# Altium PCB 两层板（未画完）.PcbDoc
Units mil, origin at the board's own origin, x right, y up, seen from the top; angles counter-clockwise.
Board outline 2498.11 x 2068.5 mil, 2 copper layers (Top Layer, Bottom Layer); 105 components, 73 nets, 380 pads, 95 vias.
Unrouted connection lines stored in the file: 41.
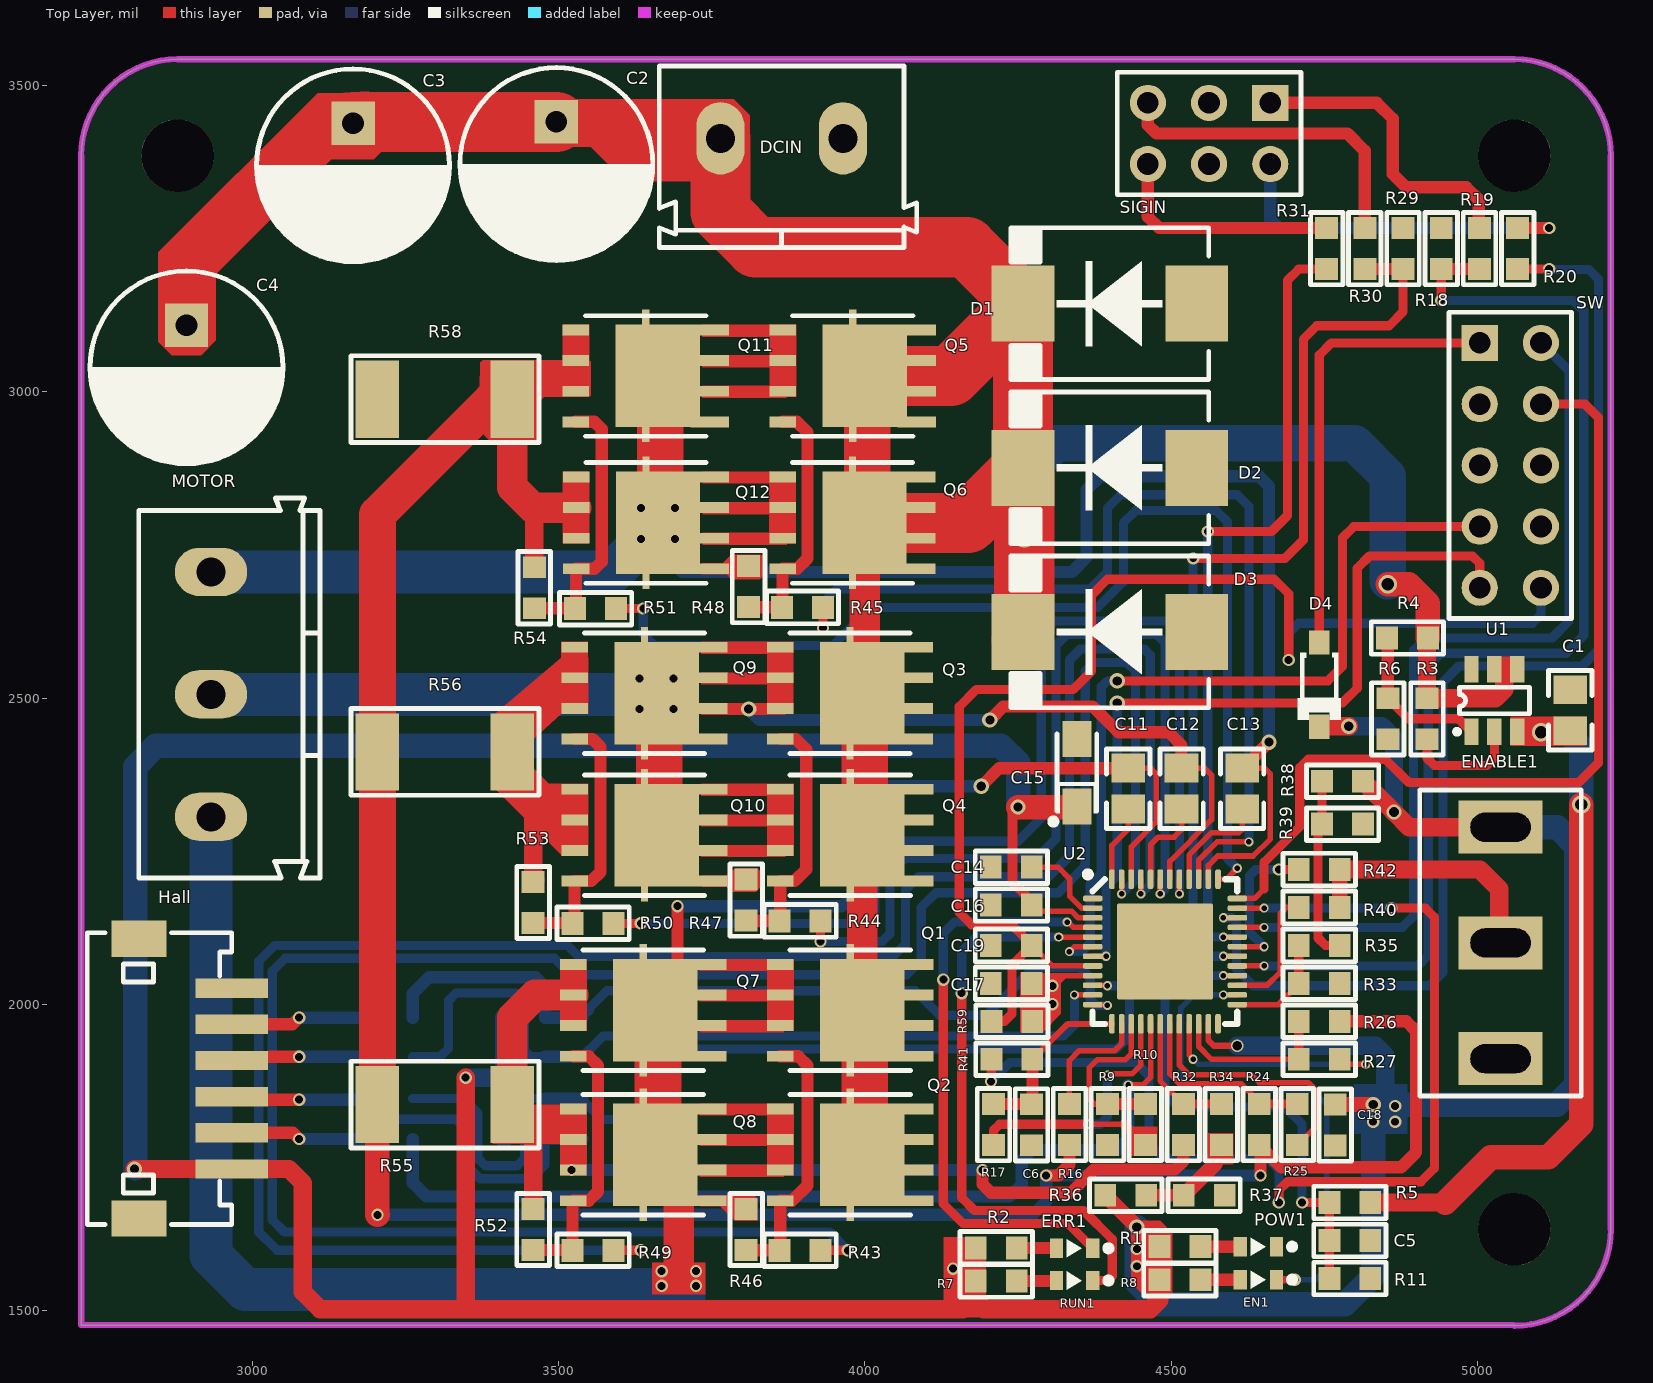
[diagram p0: Top Layer view]
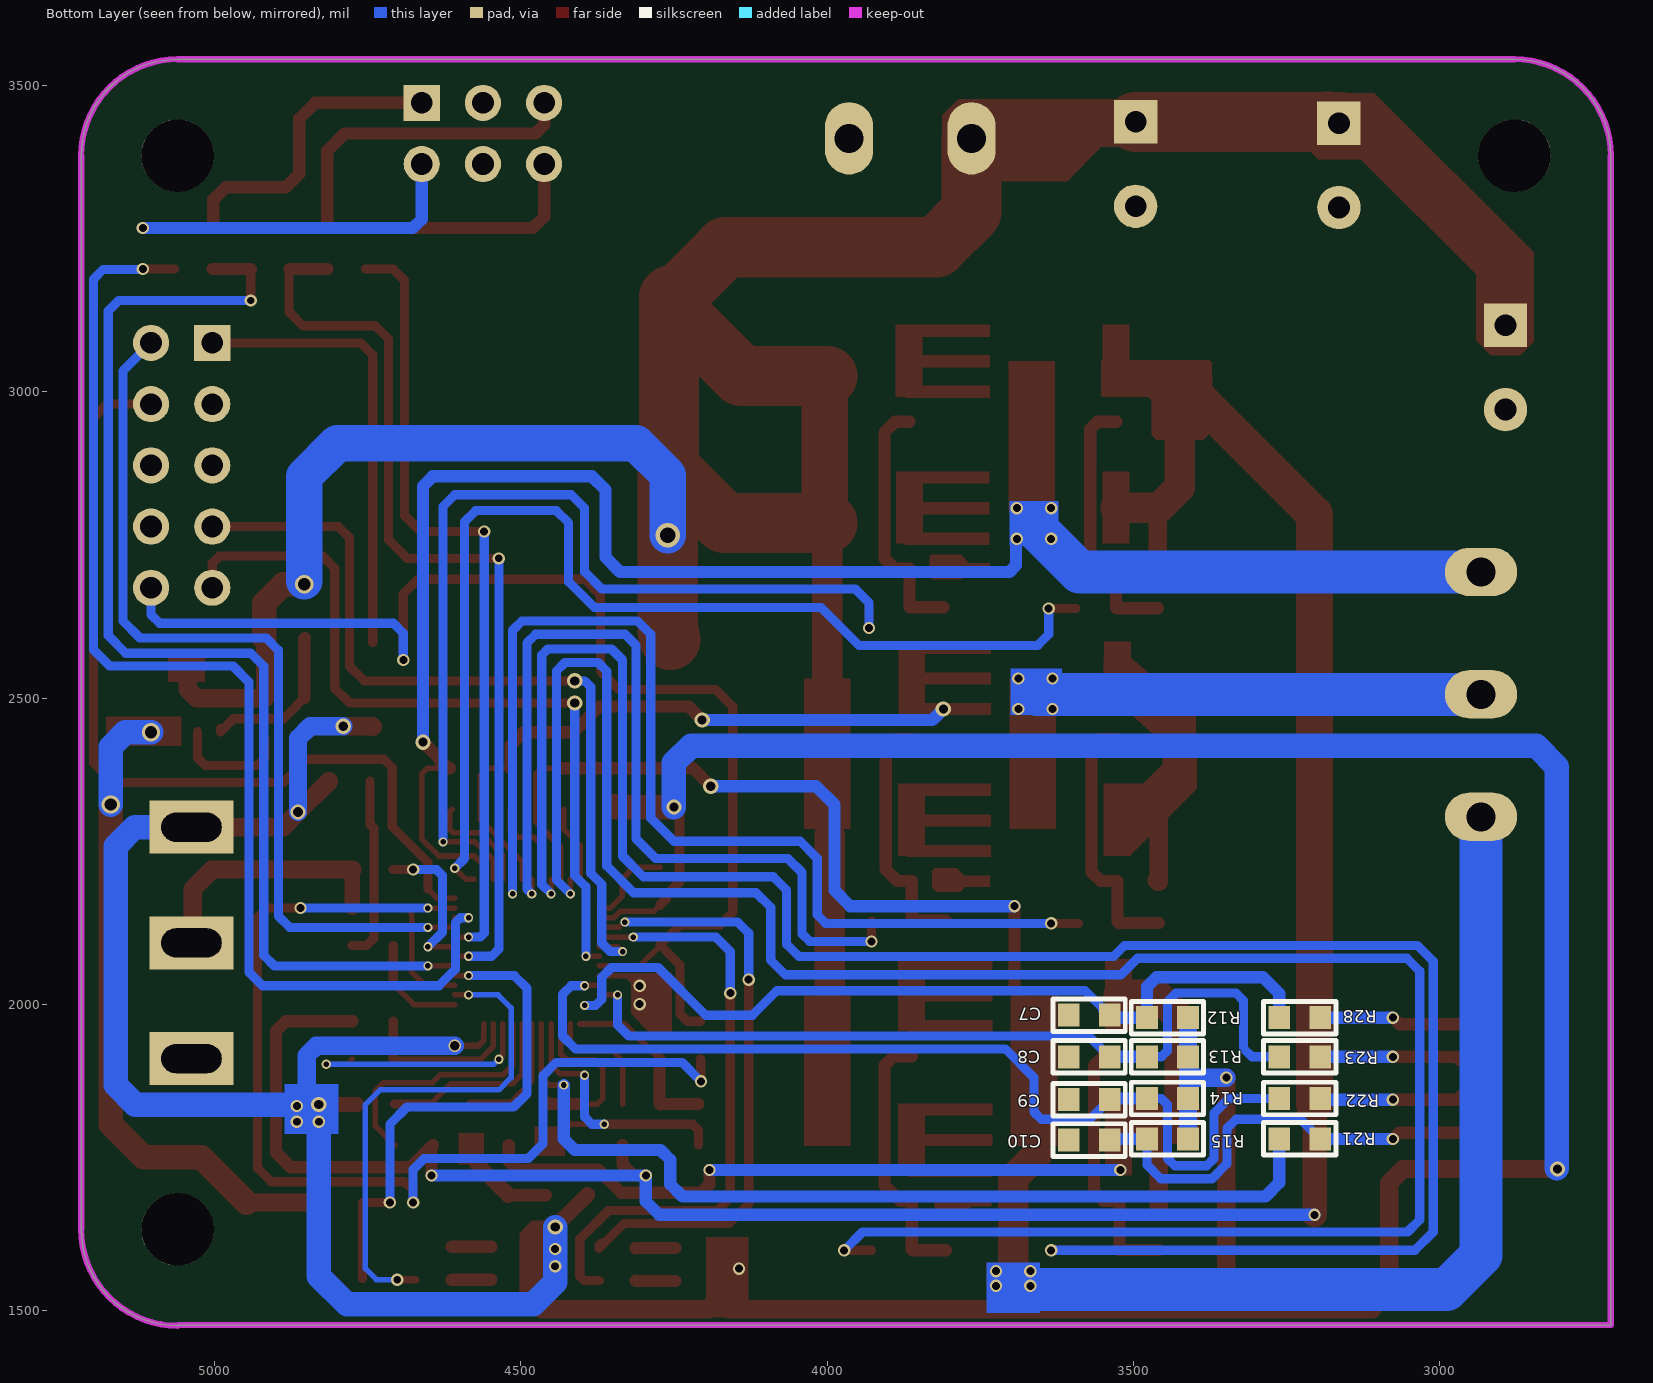
[diagram p1: Bottom Layer view, seen from below]
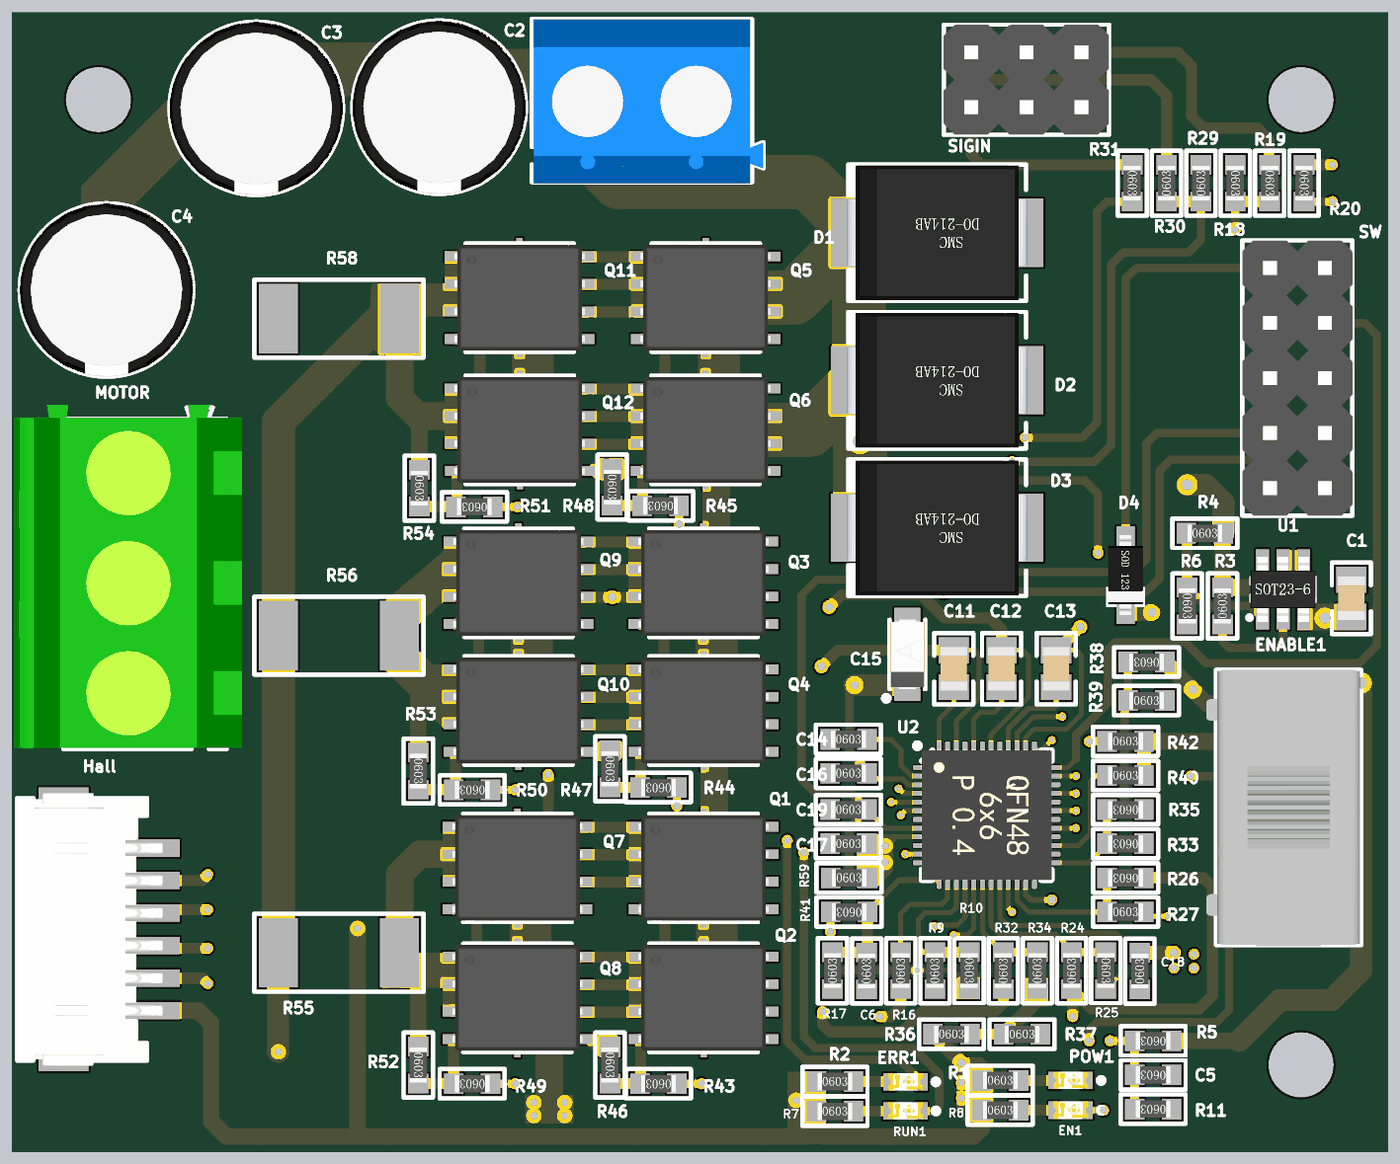
[diagram p2: 3D render of the assembled board from above, using the file's embedded part models]
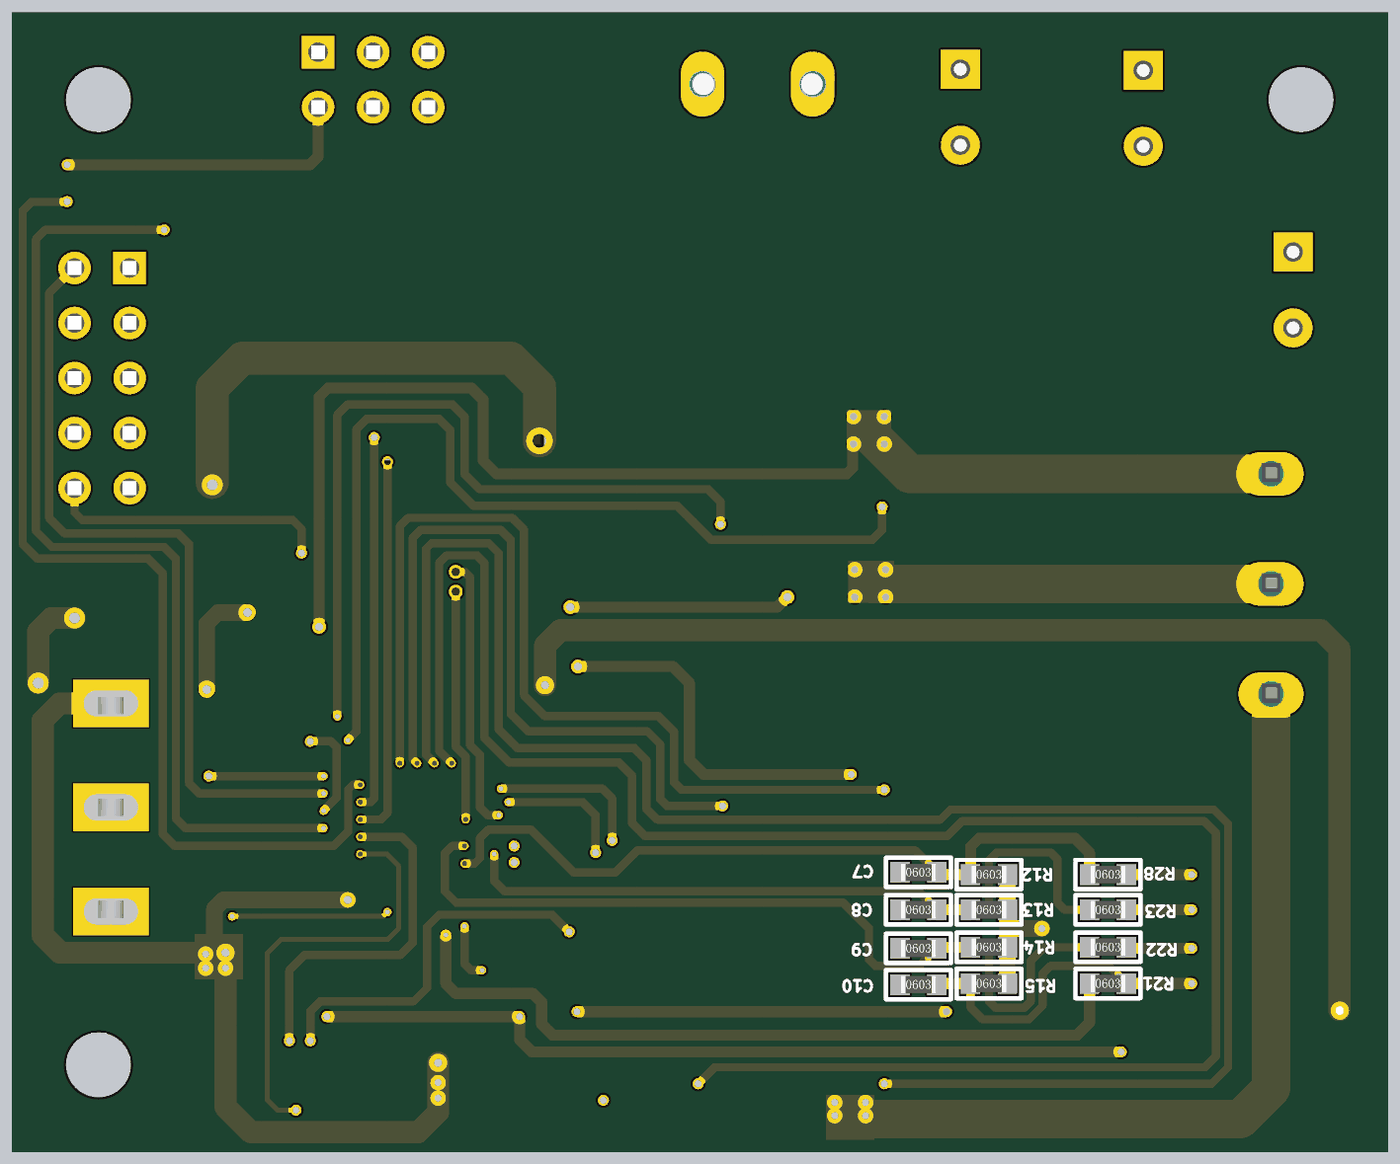
[diagram p3: 3D render of the assembled board from below, using the file's embedded part models]

## Layer stack, top to bottom
Top Solder: solder mask 0.4, Solder Resist, Dk 3.5
Top Layer: signal copper 1.4
Dielectric 1: dielectric 12.6, FR-4, Dk 4.8
Bottom Layer: signal copper 1.4
Bottom Solder: solder mask 0.4, Solder Resist, Dk 3.5

## Board outline
2720,1476 2720,3385.83 cw(c2877.48,3385.83) 2877.48,3543.31 5060.63,3543.31 cw(c5060.63,3385.83) 5218.11,3385.83 5218.11,1632.28 cw(c5060.63,1632.28) 5060.63,1474.8 5059.43,1476

## Design rules (kind name [scope] priority, off if disabled: settings)
Clearance [All] p1: gap=6 ignorepadtopadclearanceinfootprint=FALSE
PlaneClearance [All] p1: clearance=30
PlaneConnect [All] p1: planeconnectstyle=Relief reliefexpansion=20 reliefentries=4 reliefconductorwidth=20 reliefairgap=20
PolygonConnect [All] p1: connectstyle=Relief reliefconductorwidth=20 reliefentries=4 polygonreliefangle="45 Angle" airgapwidth=20
RoutingVias [All] p1: holewidth=28 width=50 viastyle="Through Hole" minholewidth=7.87 minwidth=15 maxholewidth=28 maxwidth=50
SilkToSilkClearance [All] p1: silktosilkclearance=6
SilkToSolderMaskClearance [IsPad] p1: minsilkscreentomaskgap=6 clearancetoexposedcopper=TRUE
SolderMaskExpansion [All] p1: expansion=4
Width [All] p1: maxlimit=98.43 minlimit=9 preferedwidth=10 minimp=50.000000 maximp=50.000000 favimp=50.000000
26 further rules are at their usual default settings.

## Classes and differential pairs
net class pow: GND

## Components (designator, comment, footprint, x,y, rotation, side; value= is the part's Value field where it differs from the comment)
C1 "10uF ±10% 25V" CAPC2012[0805]S-N 5152,2480 r90 top value=10uF
C2 "470uF 25V" CAPPR3.5-8X12 3496,3372 r270 top value=470uF
C3 "470uF 25V" CAPPR3.5-8X12 3164,3370 r270 top value=470uF
C4 "470uF 25V" CAPPR3.5-8X12 2892,3040 r270 top value=470uF
C5 "100nF ±10% 50V" RESC1608[0603]S-N 4792,1614 r180 top value=100nF
C6 "1uF ±10% 10V" RESC1608[0603]S-N 4272,1802.9 r90 top value=1uF
C7 "100nF ±10% 50V" RESC1608[0603]S-N 3572,1982 r180 bottom value=100nF
C8 "100nF ±10% 50V" RESC1608[0603]S-N 3572,1914 r180 bottom value=100nF
C9 "100nF ±10% 50V" RESC1608[0603]S-N 3572,1844 r180 bottom value=100nF
C10 "100nF ±10% 50V" RESC1608[0603]S-N 3572,1778 r180 bottom value=100nF
C11 "10uF ±10% 25V" CAPC2012[0805]S-N 4430.09,2352 r90 top value=10uF
C12 "10uF ±10% 25V" CAPC2012[0805]S-N 4517.05,2352 r90 top value=10uF
C13 "10uF ±10% 25V" CAPC2012[0805]S-N 4616,2352 r90 top value=10uF
C14 "100nF ±10% 50V" RESC1608[0603]S-N 4239.07,2223.72 r0 top value=100nF
C15 "10uF 16V" CAPT3216 4346,2378 r90 top value=10uF
C16 "100nF ±10% 50V" RESC1608[0603]S-N 4239.07,2162 r0 top value=100nF
C17 "100nF ±10% 50V" RESC1608[0603]S-N 4239.07,2034 r0 top value=100nF
C18 "100nF ±10% 50V" RESC1608[0603]S-N 4768,1802.54 r90 top value=100nF
C19 "100nF ±10% 50V" RESC1608[0603]S-N 4239.07,2096 r0 top value=100nF
D1 "SMDJ20CA" SMC[DO-214AB] 4400,3144 r180 top
D2 "SMDJ20CA" SMC[DO-214AB] 4400,2876 r180 top
D3 "SMDJ20CA" SMC[DO-214AB] 4400,2608 r180 top
D4 "1N5819" SOD-123-L 4742,2522 r270 top
DCIN "KF/WJ/DG 30x connecter" "KF/WJ/DG 301-2p-5.0mm" 3864,3414 r180 top
EN1 "蓝色贴片LED" LEDC1608(0603)-L 4642.47,1550 r180 top
ENABLE1 "SW-SPDT" SS12D10 5038,2100 r90 top
ERR1 "黄色贴片LED" LEDC1608(0603)-L 4342.47,1601.33 r180 top
Hall "Header 6" ZH1.5-WF-6P 2966,1878.47 r270 top
MOTOR "KF/WJ/DG 30x connecter" "KF/WJ/DG 301-3p-5.0mm" 2932,2506 r270 top
POW1 "红色贴片LED" LEDC1608(0603)-L 4642.47,1604 r180 top
Q1 "TPH1R403NL" DFN5x6 3976,1990 r270 top
Q2 "TPH1R403NL" DFN5x6 3976,1754 r270 top
Q3 "TPH1R403NL" DFN5x6 3975.69,2508 r270 top
Q4 "TPH1R403NL" DFN5x6 3976,2276 r270 top
Q5 "TPH1R403NL" DFN5x6 3980,3026 r270 top
Q6 "TPH1R403NL" DFN5x6 3979.69,2786 r270 top
Q7 "TPH1R403NL" DFN5x6 3638,1990 r270 top
Q8 "TPH1R403NL" DFN5x6 3638,1754 r270 top
Q9 "TPH1R403NL" DFN5x6 3640,2508 r270 top
Q10 "TPH1R403NL" DFN5x6 3640,2276 r270 top
Q11 "TPH1R403NL" DFN5x6 3642,3026 r270 top
Q12 "TPH1R403NL" DFN5x6 3642.31,2786 r270 top
R1 "20K ±1%" RESC1608[0603]S-N 4514.47,1604 r0 top value=20K
R2 "10K ±1%" RESC1608[0603]S-N 4214.47,1602 r0 top value=10K
R3 "1M ±1%" RESC1608[0603]S-N 4918,2466 r90 top value=1M
R4 "20K ±1%" RESC1608[0603]S-N 4886,2598 r0 top value=20K
R5 "30K ±1%" RESC1608[0603]S-N 4792,1676 r180 top value=30K
R6 "2K ±1%" RESC1608[0603]S-N 4854,2466 r270 top value=2K
R7 "10K ±1%" RESC1608[0603]S-N 4214.47,1548 r0 top value=10K
R8 "10K ±1%" RESC1608[0603]S-N 4514.47,1550 r0 top value=10K
R9 "1K ±1%" RESC1608[0603]S-N 4396,1803.46 r90 top value=1K
R10 "47K ±1%" RESC1608[0603]S-N 4458,1803.46 r270 top value=47K
R11 "10K ±1%" RESC1608[0603]S-N 4792,1552 r180 top value=10K
R12 "4.7K ±1%" RESC1608[0603]S-N 3444,1978 r180 bottom value=4.7K
R13 "4.7K ±1%" RESC1608[0603]S-N 3444,1914 r180 bottom value=4.7K
R14 "4.7K ±1%" RESC1608[0603]S-N 3444,1846 r180 bottom value=4.7K
R15 "4.7K ±1%" RESC1608[0603]S-N 3444,1780 r180 bottom value=4.7K
R16 "1K ±1%" RESC1608[0603]S-N 4334,1803.46 r90 top value=1K
R17 "10K ±1%" RESC1608[0603]S-N 4210,1803.46 r90 top value=10K
R18 "10K ±1%" RESC1608[0603]S-N 4941.2,3234 r270 top value=10K
R19 "100R ±1%" RESC1608[0603]S-N 5003.6,3234 r270 top value=100R
R20 "100R ±1%" RESC1608[0603]S-N 5066,3234 r270 top value=100R
R21 "100R ±1%" RESC1608[0603]S-N 3228,1780 r180 bottom value=100R
R22 "100R ±1%" RESC1608[0603]S-N 3228,1846 r180 bottom value=100R
R23 "100R ±1%" RESC1608[0603]S-N 3228,1914 r180 bottom value=100R
R24 "1K ±1%" RESC1608[0603]S-N 4644,1803.46 r90 top value=1K
R25 "100K ±1%" RESC1608[0603]S-N 4706,1803.46 r270 top value=100K
R26 "1K ±1%" RESC1608[0603]S-N 4742,1972 r180 top value=1K
R27 "100K ±1%" RESC1608[0603]S-N 4742,1910 r0 top value=100K
R28 "100R ±1%" RESC1608[0603]S-N 3228,1978 r180 bottom value=100R
R29 "10K ±1%" RESC1608[0603]S-N 4878.8,3234 r90 top value=10K
R30 "100R ±1%" RESC1608[0603]S-N 4816.4,3234 r90 top value=100R
R31 "100R ±1%" RESC1608[0603]S-N 4754,3234 r270 top value=100R
R32 "1K ±1%" RESC1608[0603]S-N 4520,1803.46 r90 top value=1K
R33 "1K ±1%" RESC1608[0603]S-N 4742,2034 r180 top value=1K
R34 "100K ±1%" RESC1608[0603]S-N 4582,1803.46 r90 top value=100K
R35 "100K ±1%" RESC1608[0603]S-N 4742,2096 r180 top value=100K
R36 "10K ±1%" RESC1608[0603]S-N 4426,1688 r0 top value=10K
R37 "10K ±1%" RESC1608[0603]S-N 4554,1688 r0 top value=10K
R38 "10K ±1%" RESC1608[0603]S-N 4780,2364 r180 top value=10K
R39 "10K ±1%" RESC1608[0603]S-N 4780,2294 r0 top value=10K
R40 "1K ±1%" RESC1608[0603]S-N 4742,2158 r0 top value=1K
R41 "100R ±1%" RESC1608[0603]S-N 4240,1910 r180 top value=100R
R42 "1K ±1%" RESC1608[0603]S-N 4742,2220 r0 top value=1K
R43 "4R7 ±1%" RESC1608[0603]S-N 3894,1598 r180 top value=4R7
R44 "4R7 ±1%" RESC1608[0603]S-N 3894,2136 r180 top value=4R7
R45 "4R7 ±1%" RESC1608[0603]S-N 3898,2648 r180 top value=4R7
R46 "10K ±1%" RESC1608[0603]S-N 3806,1632 r270 top value=10K
R47 "10K ±1%" RESC1608[0603]S-N 3806,2170 r270 top value=10K
R48 "10K ±1%" RESC1608[0603]S-N 3810,2682 r270 top value=10K
R49 "4R7 ±1%" RESC1608[0603]S-N 3556,1598 r180 top value=4R7
R50 "4R7 ±1%" RESC1608[0603]S-N 3556,2132 r180 top value=4R7
R51 "4R7 ±1%" RESC1608[0603]S-N 3560,2646 r180 top value=4R7
R52 "10K ±1%" RESC1608[0603]S-N 3458,1632 r270 top value=10K
R53 "10K ±1%" RESC1608[0603]S-N 3458,2166 r270 top value=10K
R54 "10K ±1%" RESC1608[0603]S-N 3460,2680 r270 top value=10K
R55 "2mR ±1%" RESC6332[2512]S 3314,1836 r0 top value=2mR
R56 "2mR ±1%" RESC6332[2512]S 3314,2412 r0 top value=2mR
R58 "2mR ±1%" RESC6332[2512]S 3314,2988 r0 top value=2mR
R59 "10K ±1%" RESC1608[0603]S-N 4240,1972 r0 top value=10K
RUN1 "翠绿贴片LED" LEDC1608(0603)-L 4342.47,1548.67 r180 top
SIGIN "Header 3X2" HDR2X3 4662,3472 r180 top
SW "Header 5X2" HDR2X5 5004,3080 r270 top
U1 "ETA7014" SOT-23-6 5028,2496 r90 top
U2 "MM32SPIN360C" QFN48-6x6 4490,2086 r0 top

## Footprints (in the part's own frame and the unit in brackets; to place one, negate y for a bottom-side part, rotate by r counter-clockwise, add the part's x,y. Pads: shape width x height; smd on the part's side, far side on the other; paste and mask are expansions set on the pad)
CAPC2012[0805]S-N [mm]
  rect 1.2x1.4 smd: 1(-0.85,0) 2(0.85,0)
  silkscreen extent -1.65,-0.9 1.65,0.9, body extent -1,-0.63 1,0.62, height 1.25
CAPPR3.5-8X12 [mm]
  rect 1.8x1.8 hole 0.9: 1(-1.75,0)
  round 1.8 hole 0.9: 2(1.75,0)
  silkscreen extent -4,-4.01 4,4, body extent -4,-4 4,4, height 12
CAPT3216 [mm]
  rect 1.5x1.2 smd: 1(-1.4,0) 2(1.4,0)
  silkscreen extent -2.15,-0.9 1.6,1.1, body extent -1.6,-0.8 1.6,0.8, height 1.6
DFN5x6 [mm]
  rect 0.45x1.6 smd: 1(-1.905,2.65) 1(-0.635,2.65) 1(0.635,2.65) 1(1.905,2.65)
  rect 4.25x3.5 smd: 1(0,0.5)
  rect 5.5x0.3 smd: 1(0,0)
  rect 0.45x1.1 smd: 2(1.905,-2.9) 3(-1.905,-2.9) 3(-0.635,-2.9) 3(0.635,-2.9)
  silkscreen extent -2.5,-2.5 2.5,2.5, body extent -2.45,-3 2.45,3, height 1
HDR2X3 [mm]
  rect 1.5x1.5 hole 0.9: 1(0,0)
  round 1.5 hole 0.9: 2(0,2.54) 3(2.54,0) 4(2.54,2.54) 5(5.08,0) 6(5.08,2.54)
  silkscreen extent -1.27,-1.27 6.35,3.81, body extent -1.27,-1.27 6.35,3.81, height 8.54
HDR2X5 [mm]
  rect 1.5x1.5 hole 0.9: 1(0,0)
  round 1.5 hole 0.9: 2(0,2.54) 3(2.54,0) 4(2.54,2.54) 5(5.08,0) 6(5.08,2.54) 7(7.62,0) 8(7.62,2.54) 9(10.16,0) 10(10.16,2.54)
  silkscreen extent -1.27,-1.27 11.43,3.81, body extent -1.27,-1.27 11.43,3.81, height 8.54
"KF/WJ/DG 301-2p-5.0mm" [mm]
  oval 2x3 hole 1.2: 1(2.54,0) 2(-2.54,0)
  silkscreen extent -5.6,-3 5.08,4.53, body extent -5.6,-3 5,4.6, height 10
"KF/WJ/DG 301-3p-5.0mm" [mm]
  oval 2x3 hole 1.2: 1(5.08,0) 2(0,0) 3(-5.08,0)
  silkscreen extent -8.14,-3 7.62,4.53, body extent -8.27,-5.26 7.57,5.24, height 14.35
LEDC1608(0603)-L [mm]
  rect 0.55x0.8 smd: A(0.75,0) C(-0.75,0)
  silkscreen extent -1.53,-0.38 0.33,0.38, body extent -0.8,-0.4 0.8,0.4, height 0.64
QFN48-6x6 [mm]
  rrect5% 4x4 smd paste+0 mask+0.05: 0(0,0)
  rrect50% 0.8x0.23 smd paste+0 mask+0.05: 1(-3,2.2) 2(-3,1.8) 3(-3,1.4) 4(-3,1) 5(-3,0.6) 6(-3,0.2) 7(-3,-0.2) 8(-3,-0.6) 9(-3,-1) 10(-3,-1.4) 11(-3,-1.8) 12(-3,-2.2) 25(3,-2.2) 26(3,-1.8) 27(3,-1.4) 28(3,-1) 29(3,-0.6) 30(3,-0.2) 31(3,0.2) 32(3,0.6) 33(3,1) 34(3,1.4) 35(3,1.8) 36(3,2.2)
  rrect50% 0.23x0.8 smd paste+0 mask+0.05: 13(-2.2,-3) 14(-1.8,-3) 15(-1.4,-3) 16(-1,-3) 17(-0.6,-3) 18(-0.2,-3) 19(0.2,-3) 20(0.6,-3) 21(1,-3) 22(1.4,-3) 23(1.8,-3) 24(2.2,-3) 37(2.2,3) 38(1.8,3) 39(1.4,3) 40(1,3) 41(0.6,3) 42(0.2,3) 43(-0.2,3) 44(-0.6,3) 45(-1,3) 46(-1.4,3) 47(-1.8,3) 48(-2.2,3)
  silkscreen extent -3.32,-3 3,3.32, body extent -3.02,-3.02 3.02,3.02, height 0.65
RESC1608[0603]S-N [mm]
  rect 0.9x0.95 smd: 1(-0.85,0) 2(0.85,0)
  silkscreen extent -1.5,-0.67 1.5,0.67, body extent -0.8,-0.4 0.8,0.4, height 0.45
RESC6332[2512]S [mm]
  rect 1.8x3.2 smd: 1(-2.8,0) 2(2.8,0)
  silkscreen extent -3.9,-1.8 3.9,1.8, body extent -3.22,-1.68 3.22,1.68, height 0.71
SMC[DO-214AB] [mm]
  rect 2.6x3.15 smd: A(-3.6,0) K(3.6,0)
  silkscreen extent -4.1,-3.15 4.1,3.15, body extent -4.17,-3.11 4.18,3.11, height 2.3
SOD-123-L [mm]
  rect 1x0.85 smd: A(-1.75,0) K(1.75,0)
  silkscreen extent -1.32,-0.9 1.48,0.9, body extent -1.85,-0.8 1.85,0.8, height 1.2
SOT-23-6 [mm]
  rect 1.1x0.6 smd: 1(-1.3,0.95) 2(-1.3,0) 3(-1.3,-0.95) 4(1.3,-0.95) 5(1.3,0) 6(1.3,0.95)
  silkscreen extent -1.37,-1.45 0.55,1.62, body extent -1.5,-1.5 1.5,1.5, height 1.55
SS12D10 [mm]
  rect 2.2x3.5 hole 1.2 slot 2.5 at 90 deg mask+0.07: 1(-4.8,0) 2(0,0) 3(4.8,0)
  silkscreen extent -6.35,-3.35 6.35,3.35, body extent -6.4,-3.3 6.35,3.8, height 12.5
ZH1.5-WF-6P [mm]
  rect 1.5x2.3 smd: 0(-5.8,-3.85) 0(5.8,-3.85)
  rect 0.8x3 smd: 1(-3.75,0) 2(-2.25,0) 3(-0.75,0) 4(0.75,0) 5(2.25,0) 6(3.75,0)
  silkscreen extent -6.05,-6 6.05,0, body extent -6.29,-6 6.29,0.71, height 3.9

## Part data
C1 C11 C12 C13: library part Cap-Chip, "贴片电容", Tolerance=±10%, Voltage=25V, Published=2020-12-18, Revision=V1.1
C2 C3 C4: library part Cap-Elect, "Polarized Capacitor (Radial)", Voltage=25V, Price(RMB)=0.000, Published=8-Jun-2000, Publisher="Altium Limited", Revision="July-2002: Re-released for DXP Platform."
C5 C7 C8 C9 C10 C14 C16 C17 C18 C19: library part Cap-Chip_1, "贴片电容", Tolerance=±10%, Voltage=50V, Published=2020-12-18, Revision=V1.1
C6: library part Cap-Chip_2, "贴片电容", Tolerance=±10%, Voltage=10V, Published=2020-12-18, Revision=V1.1
C15: library part Cap-Tan, "Tantalum Capacitor", Voltage=16V, Price(RMB)=0.000, Published=8-Jun-2000, Publisher="Altium Limited", Revision="July-2002: Re-released for DXP Platform."
D1 D2 D3: library part "Diode TVS Bi-Dir", "TRANSIENT VOLTAGE  SUPPRESSOR DIODE", Imax=500mA, Price(RMB)=0.000, Published=8-Jun-2000, Publisher="Altium Limited"
D4: library part Diode, "普通二极管 Diode", Imax=500mA, Price(RMB)=0.000, Published=8-Jun-2000, Publisher="Altium Limited", Revision="July-2002: Re-released for DXP Platform."
DCIN: library part "KF/WJ/DG 30x", "接线端子 2Pin"
EN1: library part "LED Chip Blue", Color=Blue, Price(RMB)=0.00, Published=8-Jun-2000, Publisher="Altium Limited", Revision="July-2002: Re-released for DXP Platform."
ENABLE1: "单刀双掷开关 3脚船型、钮子、拨动开关 SPDT Subminiature Toggle Switch"
ERR1: library part "LED Chip Yellow", Price(RMB)=0.00, Published=8-Jun-2000, Publisher="Altium Limited", Revision="July-2002: Re-released for DXP Platform."
Hall: "Header, 6-Pin", LatestRevisionDate=17-Jul-2002, LatestRevisionNote="Re-released for DXP Platform.", Price(RMB)=0.00, Publisher="Altium Limited"
MOTOR: library part "KF/WJ/DG 30x-3P", "接线端子 3Pin"
POW1: library part "LED Chip Red", Price(RMB)=0.00, Published=8-Jun-2000, Publisher="Altium Limited", Revision="July-2002: Re-released for DXP Platform."
Q1 Q2 Q3 Q4 Q5 Q6 Q7 Q8 Q9 Q10 Q11 Q12: "东芝 N沟 MOS"
R1 R4: library part Res-Chip_2, "贴片电阻", Tolerance=±1%, Published=8-Jun-2000, Revision="July-2002: Re-released for DXP Platform."
R2 R7 R8 R11 R17 R18 R29 R36 R37 R38 R39 R46 R47 R48 R52 R53 R54 R59: library part Res-Chip, "贴片电阻", Tolerance=±1%, Published=8-Jun-2000, Revision="July-2002: Re-released for DXP Platform."
R3: library part Res-Chip_6, "贴片电阻", Tolerance=±1%, Published=8-Jun-2000, Revision="July-2002: Re-released for DXP Platform."
R5: library part Res-Chip_1, "贴片电阻", Tolerance=±1%, Published=8-Jun-2000, Revision="July-2002: Re-released for DXP Platform."
R6: library part Res-Chip_9, "贴片电阻", Tolerance=±1%, Published=8-Jun-2000, Revision="July-2002: Re-released for DXP Platform."
R9 R16 R24 R26 R32 R33 R40 R42: library part Res-Chip_3, "贴片电阻", Tolerance=±1%, Published=8-Jun-2000, Revision="July-2002: Re-released for DXP Platform."
R10: library part Res-Chip_4, "贴片电阻", Tolerance=±1%, Published=8-Jun-2000, Revision="July-2002: Re-released for DXP Platform."
R12 R13 R14 R15: library part Res-Chip_7, "贴片电阻", Tolerance=±1%, Published=8-Jun-2000, Revision="July-2002: Re-released for DXP Platform."
R19 R20 R21 R22 R23 R28 R30 R31 R41: library part Res-Chip_8, "贴片电阻", Tolerance=±1%, Published=8-Jun-2000, Revision="July-2002: Re-released for DXP Platform."
R25 R27 R34 R35: library part Res-Chip_5, "贴片电阻", Tolerance=±1%, Published=8-Jun-2000, Revision="July-2002: Re-released for DXP Platform."
R43 R44 R45 R49 R50 R51: library part Res-Chip_10, "贴片电阻", Tolerance=±1%, Published=8-Jun-2000, Revision="July-2002: Re-released for DXP Platform."
R55 R56 R58: library part Res-Chip_11, "贴片电阻", Tolerance=±1%, Published=8-Jun-2000, Revision="July-2002: Re-released for DXP Platform."
RUN1: library part "LED Chip Green", Price(RMB)=0.00, Published=8-Jun-2000, Publisher="Altium Limited", Revision="July-2002: Re-released for DXP Platform."
SIGIN: "Header, 3-Pin, Dual row", LatestRevisionDate=17-Jul-2002, LatestRevisionNote="Re-released for DXP Platform.", Price(RMB)=0.00, Publisher="Altium Limited"
SW: "Header, 5-Pin, Dual row", LatestRevisionDate=17-Jul-2002, LatestRevisionNote="Re-released for DXP Platform.", Price(RMB)=0.00, Publisher="Altium Limited"
U1: "ETA7014 OVPоƬ"
U2: ComponentLink1Description="Manufacturer Link", ComponentLink1URL=www.st.com/stm32, ComponentLink2Description=Datasheet, ComponentLink2URL=http://www.st.com/stonline/products/literature/ds/13587.pdf, DatasheetVersion="rev6, Mar-2008", PackageDescription="48-Pin Low-Profile Quad Flat Pack, 7 x 7 mm Body, 0.5 mm Pitch (LQFP48)", PackageReference=LQFP48, PackageVersion=Mar-2008, Published=30-May-2008, Publisher="Altium Limited"

## Free pads (board coordinates)
  round 118.11 hole 118.11 unplated: 0(2877.48,3385.83) 0(5060.63,1632.28) 0(5060.63,3385.83)

## Via types
v1: diameter 20, hole 13, Top Layer to Bottom Layer, 48 vias
v2: diameter 15, hole 9, Top Layer to Bottom Layer, 27 vias
v3: diameter 25, hole 15, Top Layer to Bottom Layer, 10 vias
v4: diameter 30, hole 20, Top Layer to Bottom Layer, 3 vias
v5: diameter 20, hole 12, Top Layer to Bottom Layer, 3 vias
v6: diameter 25, hole 16, Top Layer to Bottom Layer, 2 vias
v7: diameter 40, hole 25, Top Layer to Bottom Layer, 1 vias
v8: diameter 20, hole 15, Top Layer to Bottom Layer, 1 vias

## Nets (pads, with @x,y where several pads share a name; then routed paths per layer and width w, separated by ;. In a path a pad name is that pad's centre, name@x,y a point inside that pad or via, vN(x,y) a via of type N, cw(c..) or ccw(c..) an arc to the next point about the centre after c; other vN are vias at no path point)
A0: C9.2 R14.1 R22.1 U2.10 | length 1594
  Top Layer w9: U2.10 4395.15,2030.85 v2(4396,2030)
  Bottom Layer w15: R22.1 3344,1846 3368,1822 3368,1748 3380,1736 3432,1736 3444,1748 3444,1836 3454,1846 R14.1 ; C9.2 3538.54,1843.02 3548.75,1832.8 3549.74,1832.8 3570.74,1811.8 3628.77,1811.8 3628.97,1812 3650,1812 3662,1824 3662,1880 3709,1927 4411,1927 4432,1948 4432,2016 4418,2030 v2(4396,2030)
  Bottom Layer w20: R14.1 C9.2@3538.54,1846
A1: C8.2 R13.1 R23.1 U2.11 | length 1360.3
  Top Layer w9: v2(4342.13,2015.13) U2.11
  Bottom Layer w15: R23.1 3306,1914 3320,1928 3320,2006 3332,2018 3430,2018 3444,2004 3444,1924 3454,1914 R13.1 ; C8.2 3538.54,1914.98 3548.75,1925.2 3549.74,1925.2 3572.54,1948 4324,1948 4342.13,1966.13 v2(4342.13,2015.13)
  Bottom Layer w20: R13.1 C8.2
A2: C7.2 R12.1 R28.1 U2.12 | length 1379.4
  Top Layer w9: U2.12 4393.02,1999.36 4394.38,1998 v2(4396,1998)
  Bottom Layer w15: C7.2@3547.24,1990.7 3578.54,2022 4082,2022 4122,1982 4198,1982 4276,2060 4352,2060 4368,2044 4368,2008 4378,1998 v2(4396,1998)
  Bottom Layer w20: R28.1 3261.46,2017.46 3288,2044 3462,2044 3477.46,2028.54 R12.1 C7.2@3538.54,1978 ; C7.2 3538.54,1982.98 3546.25,1990.7 C7.2@3547.24,1990.7
A3: C6.2 R17.2 R41.1 U2.13 | length 291
  Top Layer w10: R41.1 4273.46,1910.98 4286.18,1923.7 4287.17,1923.7 4331.35,1967.89 U2.13
  Top Layer w20: R17.2 4271.43,1836.93 C6.2 4273.46,1837.83 R41.1
A4: R16.2 U2.14 | length 200.2
  Top Layer w9: R16.2 4334,1908 4350,1924 4408,1924 4419.13,1935.13 U2.14
A5: R9.2 R10.1 U2.15 | length 274.8
  Top Layer w9: R9.2 4375.07,1836.93 4366,1846 4366,1896 4379,1909 4425,1909 4434.88,1918.88 U2.15 ; R10.1@4456,1838.93 R10.1
  Top Layer w20: R9.2 4454,1836.93 R10.1@4456,1838.93
A6: R10.2 R17.1 U2.16 | length 553
  Top Layer w9: v2(4364,1804) 4423.02,1804 4424,1804 4443.8,1784.2 R10.2@4443.8,1783.22 ; v2(4396,1884) 4398,1886 4436,1886 4450.63,1900.63 U2.16
  Top Layer w15: R17.1 4210,1794 4220,1804 v2(4364,1804) ; 4423.02,1804 4443.8,1783.22 R10.2@4457.02,1770
  Bottom Layer w15: v2(4364,1804) 4384,1804 4396,1816 v2(4396,1884)
A7: R21.1 U2.17 | length 1528.7
  Top Layer w9: v2(4430,1868) 4454,1868 4466.38,1880.38 U2.17
  Bottom Layer w20: R21.1 3261.46,1708.54 3284,1686 4236,1686 4256,1706 4256,1746 4272,1762 4412,1762 4430,1780 v2(4430,1868)
A9: R18.2 R19.2 U2.29 | length 1949.3
  Top Layer w9: U2.29 v2@4651.62,2062.38
  Top Layer w15: v5(4941.2,3149.2) R18.2
  Top Layer w20: R18.2 R19.2
  Bottom Layer w15: v2(4651.87,2062.38) 4902.38,2062.38 4920,2080 4920,2552 4941.25,2573.25 5145.25,2573.25 5174,2602 5174,3132 5156.8,3149.2 v5(4941.2,3149.2)
A10: R29.1 R30.1 U2.30 | length 1548
  Top Layer w9: v2(4585.37,2078.13) U2.30
  Top Layer w15: v5(4536,2728) 4686,2728 4716,2758 4716,3086 4738,3108 4856,3108 4878.8,3130.8 R29.1
  Top Layer w20: R30.1 R29.1@4877.82,3200.54
  Bottom Layer w15: v5(4536,2728) 4536,2090 4547.87,2078.13 v2(4585.37,2078.13)
A11: R42.1 U2.31 | length 254.5
  Top Layer w9: U2.31 v2(4651.87,2093.87)
  Top Layer w15: v1(4676,2220) R42.1
  Bottom Layer w15: v2(4651.87,2093.87) 4628,2117.75 4628,2210 4638,2220 v1(4676,2220)
A12: R31.2 U2.32 | length 1303.2
  Top Layer w9: v2(4585.37,2109.62) U2.32
  Top Layer w15: v1(4560,2772) 4664,2772 4690,2798 4690,3182 4708.54,3200.54 R31.2
  Bottom Layer w15: v1(4560,2772) 4560,2116 4566.38,2109.62 v2(4585.37,2109.62)
B0: R32.2 R34.2 U2.18 | length 209.2
  Top Layer w9: U2.18 4482.13,1874.8 4505.8,1851.13 4505.8,1850.15 4519.02,1836.93 R32.2
  Top Layer w15: R32.2 R34.2
B1: R24.2 R25.1 U2.19 | length 314.3
  Top Layer w9: U2.19 4497.87,1886.13 4514,1870 4614.93,1870 4646,1838.93 R24.2
  Top Layer w15: R24.2 R25.1
B2: R25.2 U2.20 | length 411.3
  Top Layer w9: U2.20 4513.62,1900.38 4529,1885 4631,1885 4644,1872 4724,1872 4738,1858 4738,1802 4720.2,1784.2 4720.2,1783.22 4706.98,1770 R25.2
B10: R27.2 U2.21 | length 391.8
  Top Layer w9: U2.21 4529.37,1916.63 v2(4536,1910) ; R27.2 4783.46,1902 v2(4818,1902)
  Bottom Layer w9: v2(4536,1910) 4544,1902 v2(4818,1902)
B11: R26.2 R27.1 U2.22 | length 271.1
  Top Layer w9: U2.22 4545.12,1930.88 4566,1910 R27.1
  Top Layer w15: R27.1 R26.2
B12: R33.2 R35.2 U2.25 | length 177.3
  Top Layer w9: U2.25 4674.91,1999.39 4708.54,2033.02 R33.2
  Top Layer w15: R33.2 R35.2
B13: EN1.C U2.26 | length 828.5
  Top Layer w9: v2(4585.37,2015.13) U2.26
  Top Layer w12: EN1.C v5(4702,1550)
  Bottom Layer w9: v2(4585.37,2015.13) 4537.13,2015.13 4516,1994 4516,1880 4536,1860 4730,1860 4754,1836 4754,1568 4736,1550 v5(4702,1550)
B14: R40.1 U2.27 | length 209.3
  Top Layer w9: U2.27 4656.88,2030.88 4678,2052 4678,2148 4688,2158 R40.1
B15: C5.2 R5.2 R11.2 U2.28 | length 839.9
  Top Layer w9: v2(4585.37,2046.63) U2.28
  Top Layer w15: v1(4714,1676) R5.2 C5.2 R11.2
  Bottom Layer w15: v2(4585.37,2046.63) 4510.63,2046.63 4490,2026 4490,1854 4512,1832 4686,1832 4714,1804 v1(4714,1676)
C14: ERR1.C U2.4 | length 980.6
  Top Layer w9: v2(4330,2134) 4331.62,2134 4340.25,2125.37 U2.4
  Top Layer w15: v1(4128,2040) 4128,1674 4160,1642 4331.33,1642 ERR1.C 4372,1606.25 ERR1.C@4368.67,1609.58
  Bottom Layer w15: v1(4128,2040) 4128,2116 4146,2134 v2(4330,2134)
C15: RUN1.C U2.5 | length 994.9
  Top Layer w9: v2(4316.38,2109.62) U2.5
  Top Layer w15: v1(4158,2018) 4158,1684 4179,1663 4357,1663 4404,1616 4404,1556 4396.67,1548.67 RUN1.C
  Bottom Layer w15: v1(4158,2018) 4158,2086 4181.62,2109.62 v2(4316.38,2109.62)
D2: R20.2 U2.34 | length 1974.9
  Top Layer w9: v2(4585.37,2141.12) U2.34
  Top Layer w15: R20.2 v1(5117.46,3200.54)
  Bottom Layer w15: v2(4585.37,2141.12) 4598.88,2141.12 4607,2133 4607,2057 4634,2030 4922,2030 4944,2052 4944,2526 4970.25,2552.25 5171.45,2552.25 5198,2578.81 5198,3184 5182,3200 5118,3200 v1(5117.46,3200.54)
D3: R41.2 U2.35 | length 1737.7
  Top Layer w9: U2.35 v2(4651.87,2156.87)
  Top Layer w15: v1(4206,1874) 4206.27,1874.27 4206.27,1909.73 R41.2 ; v1(4676,1676) 4676,1696 4690,1710 4908,1710 4930,1732 4930,2142 4915.13,2156.87 v1(4860,2156.87)
  Bottom Layer w15: v1(4206,1874) 4237,1905 4442.21,1905 4464,1883.21 4464,1772 4488,1748 4658,1748 4676,1730 v1(4676,1676) ; v2(4651.87,2156.87) v1(4860,2156.87)
GND: C1.2 C2.2 C3.2 C4.2 C5.1 C6.1 C7.1 C8.1 C9.1 C10.1 C14.1 C15.2 C16.1 C17.1 C18.1 C19.1 D1.A D2.A D3.A DCIN.2 ENABLE1.1 Hall.1 POW1.C R6.2 R9.1 R11.1 R18.1 R29.2 R37.2 R39.2 R58.1 SIGIN.3 SIGIN.4 SW.3 SW.5 U1.6 U2.0 U2.1 U2.24
HOA: R43.1 U2.47 | length 3692.2
  Top Layer w9: v2(4419.13,2180.13) U2.47
  Top Layer w15: R43.1 v1(3972,1598)
  Bottom Layer w15: v1(3972,1598) 3942,1628 3052,1628 3032,1648 3032,2054 3053,2075 3493,2075 3520,2048 4068,2048 4092,2072 4092,2158 4116,2182 4316,2182 4359.85,2225.85 4359.85,2543.85 4374,2558 4428,2558 4442,2544 4442,2202.99 v2(4419.13,2180.13)
HOB: R44.1 U2.43 | length 1490.3
  Top Layer w9: v2(4482.13,2180.13) U2.43
  Top Layer w15: v1(3927.46,2102.54) R44.1
  Bottom Layer w15: v1(3927.46,2102.54) 4028.54,2102.54 4041,2115 4041,2215 4064,2238 4280,2238 4312,2270 4312,2586 4330,2604 4476,2604 4490,2590 4490,2188 v2(4482.13,2180.13)
HOC: R45.1 U2.39 | length 1585.1
  Top Layer w9: U2.39 4545.15,2235.15 4575,2265 v2(4627,2265)
  Top Layer w15: v1(3931.46,2614.54) R45.1
  Bottom Layer w15: v1(3931.46,2614.54) 3931.46,2655.46 3954,2678 4368,2678 4396,2706 4396,2810 4418,2832 4608,2832 4627,2813 v2(4627,2265)
IA: Q7.3 Q8.3 R32.1 R52.1 R55.2 | length 1486.6
  Top Layer w20: v1(4192,1729) 4192,1706 4206,1692 4336,1692 4374,1730 4506,1730 4520,1744 R32.1
  Top Layer w30: R52.1 3458,1814 3462,1818
  Top Layer w50: R55.2 3424.24,1978.24 3461,2015 Q7.3@3523.83,2015
  Bottom Layer w20: v1(3521,1729) v1(4192,1729)
IB: Q9.3 Q10.3 R33.1 R53.1 R56.2 | length 165.6
  Top Layer w30: 3454,2338 3458,2334 R53.1 3458.98,2199.46 R53.1@3461.7,2202.18 ; 3530,2271.46 3530,2292
ISUM: Q11.3 Q12.3 R16.1 R24.1 R26.1 R54.1 R55.1 R56.1 R58.2 | length 4041.6
  Top Layer w20: v1(4296,1720) 4316,1720 4334,1738 R16.1 ; R24.1 R24.1@4646,1768 ; v1(4646,1720) R24.1@4646,1768 ; R26.1 4884,1972 4900,1956 4900,1758 4875.5,1733.5 4680.5,1733.5 R24.1@4646,1768
  Top Layer w30: 3457,2811 3460,2808 R54.1
  Top Layer w40: R55.1 3203.76,1656.24 v1(3204,1656)
  Top Layer w50: R58.2@3424.24,2960.44 3424.24,2843.76 3457,2811 Q12.3@3528.14,2811
  Top Layer w60: R55.1 R56.1 3203.76,2799.76 3390,2986 3398.68,2986 3424.24,2960.44 R58.2
  Bottom Layer w20: v1(3204,1656) 4274,1656 4296,1678 v1(4296,1720) v1(4646,1720)
LOA: R49.1 U2.45 | length 3468.5
  Top Layer w9: v2(4450.63,2180.13) U2.45
  Top Layer w15: R49.1 v1(3634,1598)
  Bottom Layer w15: v1(3634,1598) 3040,1598 3010,1628 3010,2070 3036,2096 3514,2096 3532,2078 4046,2078 4066,2098 4066,2186 4088,2208 4300,2208 4334,2242 4334,2562 4352,2580 4456,2580 4466,2570 4466,2195.5 v2(4450.63,2180.13)
LOB: R50.1 U2.41 | length 1818.9
  Top Layer w9: v2@4513.62,2180.38 U2.41
  Top Layer w15: R50.1 v1(3634,2132)
  Bottom Layer w15: v1(3634,2132) 4002,2132 4016,2146 4016,2238 4044,2266 4250,2266 4288,2304 4288,2604 4310,2626 4498,2626 4513.62,2610.38 v2(4513.62,2180.13)
LOC: R51.1 U2.37 | length 1814.2
  Top Layer w9: U2.37 4590.11,2204.11 v2(4608,2222)
  Top Layer w15: R51.1 v1(3638,2646)
  Bottom Layer w15: v1(3638,2646) 3638,2604 3656,2586 3948,2586 4010,2648 4380,2648 4422,2690 4422,2786 4442,2806 4574,2806 4592,2788 4592,2238 v2(4608,2222)
NetC10_2: C10.2 Hall.5 R15.1 R21.2 | length 716.4
  Top Layer w20: Hall.5 3066.11,1789.89 v1(3076,1780)
  Bottom Layer w15: R21.2 3194.54,1780.98 3204.75,1791.2 3205.74,1791.2 3226.74,1812.2 3331.8,1812.2 3347,1797 3347,1739.3 3371.3,1715 3455,1715 3477.46,1737.46 R15.1
  Bottom Layer w20: v1(3076,1780) R21.2 ; R15.1 C10.2@3538.54,1780
NetC11_1: C11.1 U2.48 | length 125.5
  Top Layer w9: U2.48 4403.39,2259.39 4430.09,2286.09 C11.1
NetC12_1: C12.1 U2.44 | length 150.6
  Top Layer w9: U2.44 4466.38,2260.38 4479,2273 4505,2273 4517.05,2285.05 C12.1
NetC13_1: C13.1 U2.40 | length 178.1
  Top Layer w9: U2.40 4529.37,2243.37 4566,2280 4610.73,2280 4616,2285.27 4616,2314.6 C13.1@4612.06,2318.54
NetD4_A: D4.A SW.1 | length 739.4
  Top Layer w15: D4.A 4742,3060 4762,3080 SW.1
NetEN1_A: EN1.A R8.2 | length 65
  Top Layer w20: R8.2 EN1.A
NetENABLE1_2: ENABLE1.2 R40.2 R42.2 | length 424.6
  Top Layer w25: R40.2 R42.2
  Top Layer w30: R42.2 5004,2220 5036,2188 5036,2102 ENABLE1.2
NetERR1_A: ERR1.A R2.2 | length 65.3
  Top Layer w20: R2.2 4312.28,1602 ERR1.A
NetHall_2: Hall.2 R28.2 | length 233.1
  Top Layer w20: Hall.2 3065.06,1967.06 v1(3076,1978)
  Bottom Layer w20: v1(3076,1978) R28.2
NetHall_3: Hall.3 R23.2 | length 231
  Top Layer w20: Hall.3 2971.75,1913.75 3026.52,1913.75 3026.77,1914 v1(3076,1914)
  Bottom Layer w20: v1(3076,1914) R23.2
NetHall_4: Hall.4 R22.2 | length 231.4
  Top Layer w20: Hall.4 2970.94,1844 v1(3076,1844)
  Bottom Layer w20: v1(3076,1844) 3192.54,1844 R22.2
NetPOW1_A: POW1.A R1.2 | length 65
  Top Layer w20: R1.2 POW1.A
NetQ1_2: Q1.2 Q2.2 R43.2 R46.2 | length 436.7
  Top Layer w20: R46.2 3806.27,1598.27 3860.27,1598.27 3861.83,1599.83 Q2.2 3881,1679 3906,1704 3906,1900 3891,1915 Q1.2
NetQ3_2: Q3.2 Q4.2 R44.2 R47.2 | length 415.3
  Top Layer w20: R47.2 3806.27,2136.27 3860.27,2136.27 3861.83,2137.83 Q4.2 3885,2201 3904,2220 3904,2416 3887,2433 Q3.2
NetQ5_2: Q5.2 Q6.2 R45.2 R48.2 | length 418.9
  Top Layer w20: R48.2 3810.27,2648.27 3864.27,2648.27 R45.2 3865.51,2648.98 Q6.2 3889,2711 3906,2728 3906,2934 3889,2951 Q5.2
NetQ7_2: Q7.2 Q8.2 R49.2 R52.2 | length 445.2
  Top Layer w20: R52.2 3522,1598.54 R49.2 3522.54,1677.86 3523.68,1679 Q8.2 3549,1679 3564,1694 3564,1900 3549,1915 Q7.2
NetQ9_2: Q9.2 Q10.2 R50.2 R53.2 | length 435.1
  Top Layer w20: R53.2 3522,2132.54 R50.2 3525.83,2135.29 Q10.2 3553,2201 3568,2216 3568,2420 3555,2433 Q9.2
NetQ11_2: Q11.2 Q12.2 R51.2 R54.2 | length 442.7
  Top Layer w20: R54.2 3526,2646.54 R51.2 3528.14,2647.61 Q12.2 3558.28,2711 3570,2722.72 3570,2939.28 3558.28,2951 Q11.2
NetR3_1: R3.1 U1.2 | length 193.3
  Top Layer w15: R3.1 4918,2402 4930,2390 5016,2390 5028,2402 U1.2
NetR4_1: R4.1 R6.1 U1.1 | length 264.6
  Top Layer w15: R6.1 4854.98,2499.46 4865.2,2489.25 4865.2,2488.26 4887.46,2466 4969.42,2466 4987.79,2447.63 4990.6,2450.44 U1.1
  Top Layer w20: R4.1 4854,2596.54 R6.1
NetR7_2: R7.2 RUN1.A | length 65.3
  Top Layer w20: R7.2 4312.28,1548 RUN1.A
NetR19_1: R19.1 SIGIN.1 | length 505.9
  Top Layer w20: SIGIN.1 4836,3472 4862,3446 4862,3356 4884,3334 4982,3334 5002.62,3313.38 5002.62,3267.46 R19.1
NetR20_1: R20.1 SIGIN.2 | length 602.9
  Top Layer w20: R20.1 v1(5117.46,3267.46)
  Bottom Layer w20: SIGIN.2 4662,3282 4676.54,3267.46 v1(5117.46,3267.46)
NetR30_2: R30.2 SIGIN.5 | length 534.1
  Top Layer w20: SIGIN.5 4462,3436 4476,3422 4788,3422 4816.4,3393.6 R30.2
NetR31_1: R31.1 SIGIN.6 | length 385.7
  Top Layer w20: SIGIN.6 4462,3286 4480.54,3267.46 R31.1
NetR34_1: R34.1 R36.2 R37.1 | length 169.7
  Top Layer w20: R36.2 R37.1 ; R34.1@4581.02,1770 R34.1
  Top Layer w25: R37.1 4520.54,1688.98 4525.75,1694.2 4526.74,1694.2 4572.5,1739.96 4572.5,1761.48 R34.1@4581.02,1770
NetR35_1: R35.1 R38.2 R39.1 | length 299.1
  Top Layer w15: R38.2 R39.1 4740,2287.46 4740,2108 4752,2096 R35.1
RST: C19.2 R59.1 SW.10 U2.8 | length 2081.4
  Top Layer w9: C19.2@4272.54,2095.02 4285.75,2081.8 4286.74,2081.8 4306.16,2062.38 U2.8
  Top Layer w15: R59.1 4228,1972 4240,1984 4240,2063.46 C19.2 4272.54,2096.98 4239.72,2129.8 4174.2,2129.8 4154,2150 4154,2486 4182,2514 4340,2514 4370,2544 4370,2668 4396,2694 4668,2694 4692,2670 v1(4692,2562)
  Bottom Layer w15: v1(4692,2562) 4692,2606 4708,2622 5090,2622 5104,2636 SW.10
RX: SW.9 U2.7 | length 1294.6
  Top Layer w9: U2.7 v2(4393.87,2078.13)
  Top Layer w15: v3(4412,2492) 4780,2492 4804,2516 4804,2712 4824,2732 4992,2732 5004,2720 SW.9
  Bottom Layer w15: v2(4393.87,2078.13) 4393.87,2191.87 4412,2210 v3(4412,2492)
SWCLK: SW.4 U2.36 | length 1462.2
  Top Layer w9: U2.36 4636.61,2172.61 4652,2188
  Top Layer w15: 4651.87,2188 4651.87,2231.87 4710,2290 4710,2386 4724,2400 4850,2400 4888,2362 5166,2362 5198,2394 5198,2958 5176,2980 SW.4
SWDIO: SW.2 U2.33 | length 1476.5
  Top Layer w9: U2.33 v2(4651.87,2125.37)
  Bottom Layer w15: v2(4651.87,2125.37) 4877.37,2125.37 4896,2144 4896,2578 4916,2598 5122,2598 5150,2626 5150,3034 SW.2
TX: SW.7 U2.6 | length 1355.9
  Top Layer w9: v2(4334,2086) 4341.87,2093.87 U2.6
  Top Layer w15: v3(4412,2528) 4756,2528 4780,2552 4780,2762 4798,2780 SW.7
  Bottom Layer w15: v2(4334,2086) 4354,2086 4368,2100 4368,2195.7 4386,2213.7 4386,2518 4396,2528 v3(4412,2528)
VCC5V: C15.1 C16.2 C17.2 C18.2 D4.K ENABLE1.3 Hall.6 R1.1 R2.1 R7.1 R8.1 R12.2 R13.2 R14.2 R15.2 R36.1 R38.1 R59.2 U2.3 U2.9 U2.23 | length 8145.8
  Top Layer w9: C17.2 4285.17,2046.63 U2.9 ; C16.2 4282.54,2152 4337.46,2152 4348.31,2141.15 U2.3 ; 4560.87,1941.13 U2.23 ; U2.23@4560.89,1955.28 U2.23
  Top Layer w10: 4560.87,1941.13 4570,1932 v8(4608,1932)
  Top Layer w16: v3(4250,2322) 4250,2319.56 4240.82,2310.38 4240.82,2199.22 4262.82,2177.22 4262.82,2171.72 C16.2
  Top Layer w25: R36.1@4391.54,1689 R36.1 4392.54,1687.02 4397.75,1681.8 4398.74,1681.8 4444.27,1636.27 4470.33,1610.2 4475.79,1610.2 4481.01,1604.98 R1.1 ; C18.2 v3(4830,1836)
  Top Layer w30: v3(2807.17,1730.83) Hall.6 3059.17,1730.83 3082,1708 3082,1530 3110,1502 3348,1502 ; v1(3348,1880) 3348,1502 ; 4163,1505 4160,1502 3348,1502 ; R2.1 R7.1 4181.01,1514.99 4194,1502 4466,1502 4481.01,1517.01 R8.1 R1.1 ; D4.K 4742.9,2454 v6(4790,2454) ; R38.1 4813.46,2363.02 4816.18,2360.3 4817.17,2360.3 4863.73,2313.73 4888.49,2288.98 ENABLE1.3
  Top Layer w40: v3(4250,2322) 4345.12,2322 C15.1
  Bottom Layer w30: v1(3348,1880) 3410.54,1880 ; R15.2 R14.2 3410.54,1880 ; R12.2 R13.2 3410.54,1880 ; v8(4608,1932) 4834,1932 4850,1916 4850,1856 v3(4830,1836) ; v6(4790,2454) 4844,2454 4864,2434 v6(4864,2314)
  Bottom Layer w40: v3@2808,1732 2808,2388 2842,2422 4222,2422 4250,2394 v3(4250,2322) ; v3(4444,1636) v1(4444,1600) v1(4444,1572) 4444,1546 4480,1510 4784,1510 4830,1556 v1(4830,1808) v3(4830,1836) 5130,1836 5162,1868 5162,2258 5131.02,2288.98 ENABLE1.3
  other v1: 4144,1568 4866,1808 4866,1833.5 4306,2000 4306,2030
VCC12V: C2.1 C3.1 C4.1 D1.K D2.K D3.K DCIN.1 Q1.1 Q2.1 Q3.1 Q4.1 Q5.1 Q6.1 R3.2 R4.2 U1.4 U1.5 | length 4022.7
  Top Layer w30: R4.2 4918,2596.54 R3.2 5029.46,2499.46 5044,2514 5044,2536
  Top Layer w40: v4(4854,2686) 4888,2686 4919.46,2654.54 R4.2
  Top Layer w50: Q3.1@3995.37,2508 3999.37,2512 Q6.1@3999.37,2786 ; Q1.1@3995.69,1990 Q4.1@3995.69,2276
  Top Layer w98.43: C3.1 3166,3440.9 C2.1 ; DCIN.1 3764,3293.66 3821.66,3236 4166.27,3236 4245.47,3156.8 4256.3,3156.8 4258.27,3154.83 D1.K D1.K@4258.27,3133.17 ; Q6.1@3999.37,2786 4168.27,2786 4245.47,2863.2 4256.3,2863.2 D2.K@4258.27,2865.17 ; Q5.1@3999.69,3026 4140.27,3026 4245.47,3131.2 4256.3,3131.2 D1.K@4258.27,3133.17 ; D3.K@4256.3,2595.2 4258.27,2597.17 D3.K 4260,2609.73 v7(4260,2766) 4260,2863.44 D2.K@4258.27,2865.17 ; D2.K@4258.27,2865.17 D2.K D1.K@4258.27,3133.17
  Bottom Layer w60: v7(4260,2766) 4260,2864 4312,2916 4800,2916 4854,2862 v4@4854,2690.5
VCC12VO: C1.1 C14.2 R5.1 U1.3 U2.2 | length 1235.6
  Top Layer w9: C14.2 4315.32,2223.72 4334.22,2204.82 4334.22,2176.49 4353.81,2156.89 U2.2
  Top Layer w30: R5.1 4948,1676 ; C1.1@5150.28,2444.82 C1.1
  Top Layer w40: 4948,1676 5022,1750 5116,1750 5170,1804 v4(5170,2326)
  Bottom Layer w40: v4(5104,2444) 5146,2444 5170,2420 v4(5170,2326)
VSA: C11.2 MOTOR.1 Q1.3 Q2.3 Q7.1 Q8.1 R46.1 U2.46 | length 3055.3
  Top Layer w9: C11.2 4466.54,2385.46 4476,2376 4476,2298 4434.88,2256.88 U2.46
  Top Layer w20: Q7.1@3657.69,1990 3694,2026.31 v1(3694,2160) ; v3(4190,2356) 4219.46,2385.46 C11.2
  Top Layer w30: R46.1@3805.02,1665.46 R46.1
  Top Layer w50: Q8.1@3657.69,1754 3696,1715.69 3696,1556
  Bottom Layer w20: v1(3694,2160) 3962,2160 3988,2186 3988,2326 4018,2356 v3(4190,2356)
  Bottom Layer w70: MOTOR.1 2932,1590 2988,1534 3698,1534
  other v1: 3668,1540 3724,1540 3668,1564 3724,1564
VSB: C12.2 MOTOR.2 Q3.3 Q4.3 Q9.1 Q10.1 R47.1 U2.42 | length 1765.3
  Top Layer w9: U2.42 4497.87,2233.33 4566,2301.46 4566,2374 4554.54,2385.46 C12.2@4523.05,2385.46
  Top Layer w20: v3(4204,2464) 4226,2486 4372,2486 4414,2444 4496,2444 4517.05,2422.95 C12.2
  Top Layer w30: R47.1@3803.54,2201 R47.1
  Bottom Layer w20: v3(3810,2482) 3828,2464 v3(4204,2464)
  Bottom Layer w60: 3658,2506 3660,2508
  Bottom Layer w70: MOTOR.2 3658,2506
  other v1: 3631.69,2482 3687.69,2482 3631.69,2532 3687.69,2532
VSC: C13.2 MOTOR.3 Q5.3 Q6.3 Q11.1 Q12.1 R48.1 U2.38 | length 2740.5
  Top Layer w9: U2.38 4560.89,2226.71 4576.18,2242 4634,2242 4662,2270 4662,2376 4652.54,2385.46 C13.2@4619.94,2385.46
  Top Layer w20: C13.2 4619.94,2385.46 4633.56,2399.09 4633.56,2401.56 v3(4660,2428)
  Bottom Layer w20: 3652,2778 3671.21,2778 3691.21,2758 3691.21,2716.79 3702,2706 4338,2706 4362,2730 4362,2840 4384,2862 4644,2862 4660,2846 v3(4660,2428)
  Bottom Layer w60: 3652,2770 3652,2778 3656,2782 3664,2782
  Bottom Layer w70: MOTOR.3 3588,2706 3652,2770
  other v1: 3634,2760 3690,2760 3634,2810 3690,2810
pads on no net: Hall.0 SW.6 SW.8

## Keep-outs
Keep-Out Layer:
  lines w10: 5059.43,1476 4952,1476 4861.83,1476 2720,1476 2720,3385.83 cw(c2877.48,3385.83) 2877.48,3543.31 4960.63,3543.31 5060.63,3543.31 cw(c5060.63,3385.83) 5218.11,3385.83 5218.11,1732.28 5218.11,1632.28 cw(c5060.63,1632.28) 5060.63,1474.8

## Other copper
Top Layer:
  rectangle net VCC5V: 4128,1488 4198,1620
  rectangle net VSA: 3652,1526 3740,1578
  rectangle net VCC12V: 5016,2526 5076,2568
  rectangle net VSC: 3734,3090 3872,3110
  rectangle net VSC: 3734,3040 3872,3060
  rectangle net VSC: 3734,2990 3872,3010
  rectangle net VSC: 3734.31,2850 3872.31,2870
  rectangle net VSC: 3734.31,2800 3872.31,2820
  rectangle net VSC: 3734.31,2750 3872.31,2770
  rectangle net VSB: 3732,2572 3870,2592
  rectangle net VSB: 3732,2522 3870,2542
  rectangle net VSB: 3732,2472 3870,2492
  rectangle net VSB: 3732,2340 3870,2360
  rectangle net VSB: 3732,2290 3870,2310
  rectangle net VSB: 3732,2240 3870,2260
  rectangle net VSA: 3730,2054 3868,2074
  rectangle net VSA: 3730,2004 3868,2024
  rectangle net VSA: 3730,1954 3868,1974
  rectangle net VSA: 3730,1718 3868,1738
  rectangle net VSA: 3730,1768 3868,1788
  rectangle net VSA: 3730,1818 3868,1838
  rectangle net IA: 3392,1772 3542,1836
  rectangle net VCC12V: 3966,2804 4042,3050
  rectangle net VSC: 3628,2804 3704,3050
  rectangle net VSB: 3626,2286 3702,2532
  rectangle net VCC12V: 3961.69,2286 4037.69,2532
  rectangle net VCC12V: 3962,1768 4038,2014
  rectangle net VSA: 3624,1768 3700,2014
  rectangle net VSA: 3840,1720 3884,1838
  rectangle net VSA: 3840,1956 3884,2074
  rectangle net VSB: 3840,2242 3884,2360
  rectangle net VSB: 3839.69,2474 3883.69,2592
  rectangle net VSC: 3843.69,2752 3887.69,2870
  rectangle net VSC: 3844,2992 3888,3110
  rectangle net ISUM: 3506,2992 3550,3110
  rectangle net ISUM: 3506.31,2752 3550.31,2870
  rectangle net IB: 3504,2474 3548,2592
  rectangle net IB: 3504,2242 3548,2360
  rectangle net IA: 3502,1956 3546,2074
  rectangle net IA: 3502,1720 3546,1838
  rectangle net VCC12VO: 5054,2422 5178,2470
  rectangle net NetR34_1: 4560,1738 4602,1790
  rectangle net A6: 4428,1752 4478,1800
  region net VCC5V: 4434.54,1646 4434.54,1545.46 4452,1528 4502,1528 4502,1626 4482,1646
  region net ISUM: 3372,3048 3376,3052 3550,3052 3552,3050 3552,2994 3550,2992 3476,2992 3470,2986 3470,2930 3462,2922 3386,2922 3370,2938 3370,2960
  region net VSC: 3734,2720 3768,2720 3782,2734 3830,2734 3832,2732 3832,2698 3828,2694 3782,2694 3774,2702 3734,2702
  region net VSB: 3734,2210 3776,2210 3788,2222 3824,2222 3828,2218 3828,2190 3822,2184 3782,2184 3774,2192 3734,2192
  region net VSA: 3732,1688 3818,1688 3824,1682 3824,1646 3788,1646 3764,1670 3732,1670
  region net IB: 3398,2442 3460,2434 3504,2474 3548,2474 3548,2566 3504,2566 3396,2474 3398,2476
  region net IB: 3396,2418 3452,2418 3452,2392 3484,2360 3548,2360 3548,2242 3504,2242 3504,2244 3396,2352
  region net VCC12V: 3189,3491 3202,3478 3228,3452 3228,3410 3198,3380 3128,3380 2940,3192 2940,3084 2916,3060 2868,3060 2846,3082 2846,3228 3106,3488 3136,3488
  region net VCC12V: 3786,3478 3812,3452 3812,3344 3608,3344 3552,3400 3454,3400 3454,3478
  region net VCC5V: 4254,2052 4254,1954 4290,1954 4320,1984 4320,2034 4336,2050
Bottom Layer:
  rectangle net VSA: 3652,1496 3740,1578
  rectangle net VSC: 3622,2748 3702,2822
  rectangle net VSB: 3616,2472 3700,2548
  rectangle net VCC5V: 4798,1788 4886,1870